# EAGLE board wr (EAGLE 7.5.0)
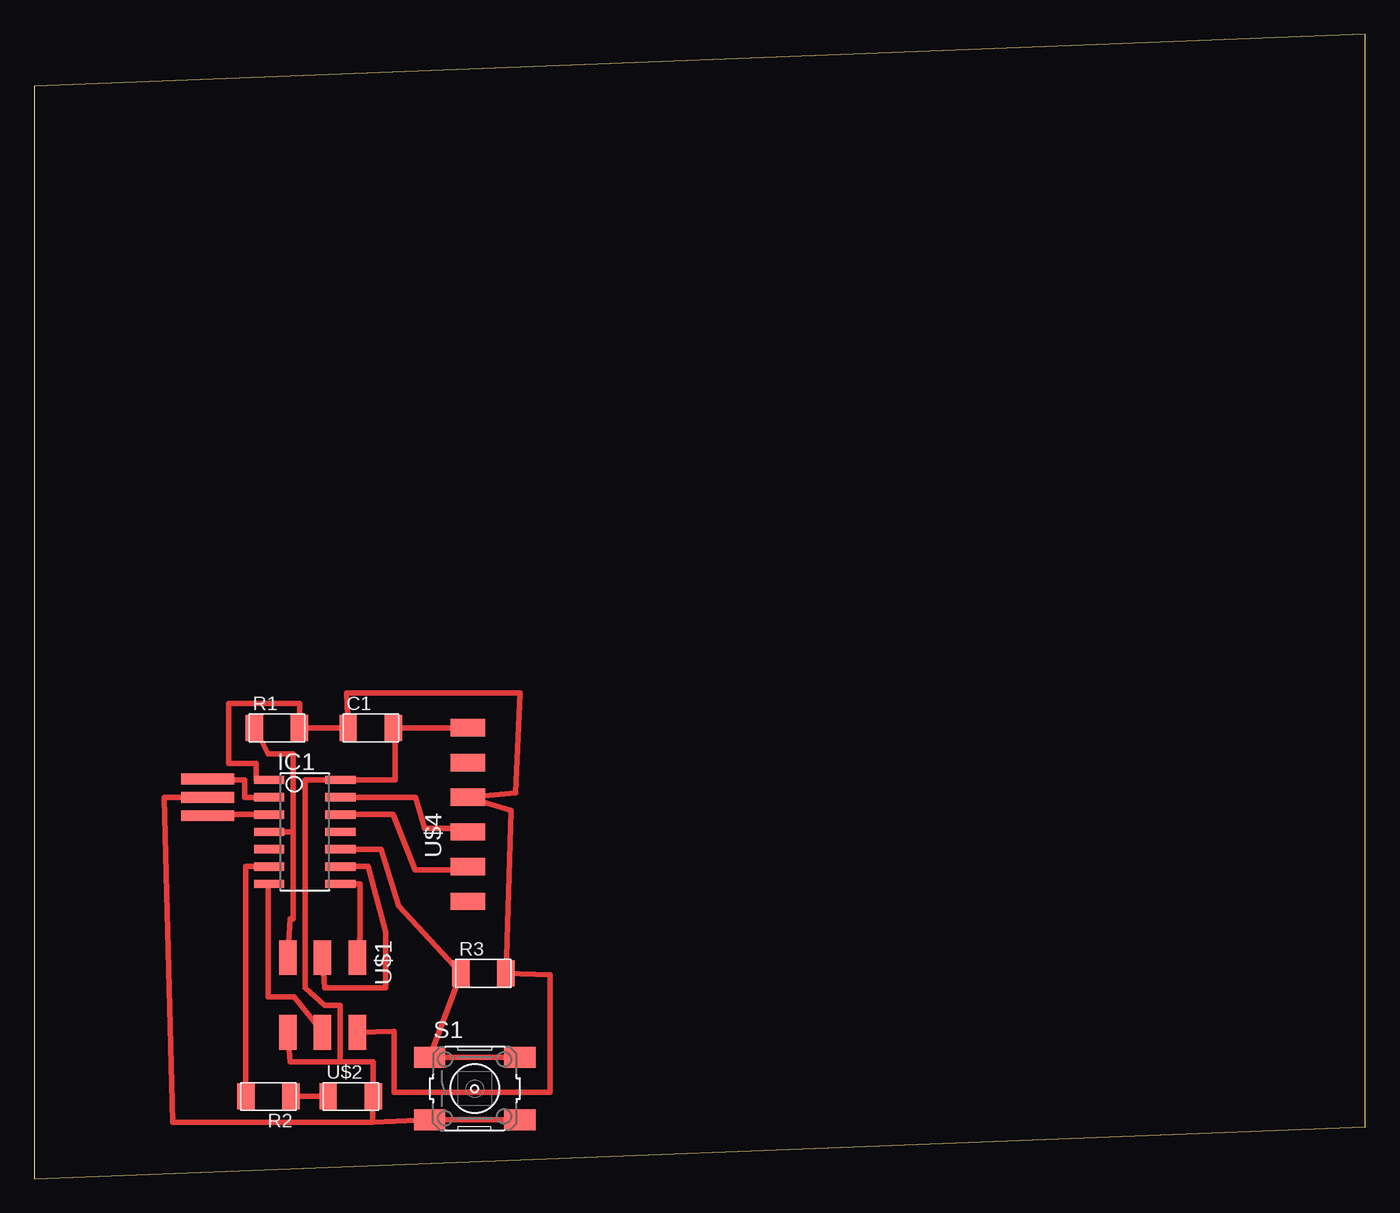
[diagram p0: board, top side]

Size 97.46 x 83.81 mm. Coordinates in mm from the lower left corner, seen from the top.
Outline: 0,0 97.46,3.81 97.46,83.81 0,80 0,0
Copper layers (1*16): Top 0.035mm / dielectric 1.5mm / Bottom 0.035mm
Design rules "default *": minimum track width 10mil, minimum drill 24mil, track to track 16mil, track to pad 16mil, pad to pad 16mil, via to via 16mil, smd to smd 16mil, copper to edge 40mil, drill to drill 8mil, minimum pad ring 10mil, minimum via ring 8mil, stop-mask expansion 4mil, vias tented up to drill 0mil, thermal gap 10mil

## Footprints (pad centres in the part's own frame; a part is rotated, then mirrored left to right if it is on the bottom)
C1206FAB = smd 1.27 x 1.905: 1 -1.651,0; 2 1.651,0
SOIC14 = smd 0.61 x 2.21: 1 -3.81,-2.603; 2 -2.54,-2.603; 3 -1.27,-2.603; 4 0,-2.603; 5 1.27,-2.603; 6 2.54,-2.603; 7 3.81,-2.603; 8 3.81,2.603; 9 2.54,2.603; 10 1.27,2.603; 11 0,2.603; 12 -1.27,2.603; 13 -2.54,2.603; 14 -3.81,2.603
R1206FAB = smd 1.27 x 1.905: 1 -1.651,0; 2 1.651,0
6MM_SWITCH = smd 2.286 x 1.524: 1 -3.302,2.286; 2 3.302,2.286; 3 -3.302,-2.286; 4 3.302,-2.286
2X03SMD = smd 2.54 x 1.27: 1 -2.54,2.54; 2 2.92,2.54; 3 -2.54,0; 4 2.92,0; 5 -2.54,-2.54; 6 2.92,-2.54
LED1206FAB = smd 1.27 x 1.905: 1 -1.651,0; 2 1.651,0
EFOBM = smd 0.8 x 3.9: 1 -1.35,0; 2 0,0; 3 1.35,0
1X06SMD = smd 2.54 x 1.27: 1 0,6.35; 2 0,3.81; 3 0,1.27; 4 0,-1.27; 5 0,-3.81; 6 0,-6.35

## Placement (x,y rotation side)
C1  CAP-US1206FAB  [C1206FAB]  24.64,33.02 0 top
IC1  ATTINY44-SSU  [SOIC14]  19.81,25.4 270 top
R1  [R1206FAB]  17.78,33.02 0 top
R2  [R1206FAB]  17.14,6.03 180 top
R3  [R1206FAB]  32.89,15.05 0 top
S1  [6MM_SWITCH]  32.26,6.6 0 top
U$1  AVRISPSMD  [2X03SMD]  21.11,13.65 270 top
U$2  LEDFAB1206  [LED1206FAB]  23.18,6.03 0 top
U$3  RESONATOR  [EFOBM]  12.7,27.94 270 top
U$4  FTDI-SMD-HEADER  [1X06SMD]  31.75,26.67 0 top

## Library data of the parts
C1 IC1 R1-R3 S1 U$1-U$4 = fab

## Nets
BUTTON: IC1.10 R3.1 S1.1 S1.2
CTS: U$4.2
GND: C1.2 IC1.14 S1.3 S1.4 U$1.6 U$2.2 U$3.2 U$4.1
LED: IC1.6 R2.2
MISO: IC1.8 U$1.1
MOSI: IC1.7 U$1.4
N$1: IC1.3 U$3.3
N$2: IC1.2 U$3.1
N$3: R2.1 U$2.1
RST: IC1.4 R1.1 U$1.5
RTS: U$4.6
RX: IC1.12 U$4.5
SCK: IC1.9 U$1.3
TX: IC1.13 U$4.4
VCC: C1.1 IC1.1 R1.2 R3.2 U$1.2 U$4.3

## Tracks (layer width: path | path; a pad name or v marks a point on that pad's centre or on a via)
BUTTON
  Top 0.406: S1.2 S1.1 R3.1 26.67,20 25.4,24.13 IC1.10
GND
  Top 0.406: 30.99,33.02 C1.2 26.42,33.02 26.42,29.21 IC1.14 19.84,29.21 19.84,13.97 21.27,12.7 22.38,12.7 22.38,8.57 | 30.99,33.02 30.99,32.77 | U$4.1 30.99,33.02 | U$1.6 18.73,8.57 22.38,8.57 | 22.38,8.57 24.83,8.57 U$2.2 24.77,4.13 | S1.4 S1.3 24.77,4.13 | U$3.2 9.52,27.94 10.16,4.13 24.77,4.13
LED
  Top 0.406: IC1.6 15.49,22.86 R2.2
MISO
  Top 0.406: U$1.1 23.88,17.78 23.88,21.59 IC1.8
MOSI
  Top 0.406: IC1.7 17.14,21.59 17.14,13.34 19.05,13.34 U$1.4
N$1
  Top 0.406: U$3.3 12.78,26.67 IC1.3
N$2
  Top 0.406: U$3.1 12.78,29.21 15.4,29.21 15.4,27.94 IC1.2
N$3
  Top 0.406: R2.1 U$2.1
RST
  Top 0.406: U$1.5 18.73,19.05 18.97,19.05 18.97,25.4 | IC1.4 18.97,25.4 | 18.97,25.4 18.97,31.11 17.14,31.11 R1.1
RX
  Top 0.406: IC1.12 26.29,26.67 27.88,22.61 31.75,22.61 U$4.5
SCK
  Top 0.406: IC1.9 24.45,22.86 25.72,18.1 25.72,13.97 21.27,13.97 U$1.3
TX
  Top 0.406: 30.99,25.65 30.99,25.15 | IC1.13 27.94,27.94 28.57,25.65 30.99,25.65 | U$4.4 31.75,25.65 30.99,25.65
VCC
  Top 0.406: IC1.1 16.26,29.21 16.26,30.42 14.22,30.42 14.22,34.8 19.43,34.8 R1.2 C1.1 22.86,35.56 35.56,35.56 35.24,28.26 U$4.3 34.93,26.99 R3.2 37.78,14.92 37.78,6.35 26.35,6.35 26.35,10.79 U$1.2